# Altium PCB car_engineSteering.PcbDoc
Units mm, origin at the board's own origin, x right, y up, seen from the top; angles counter-clockwise.
Board outline 50 x 60 mm, 2 copper layers (Top Layer, Bottom Layer); 44 components, 40 nets, 141 pads, 9 vias.
Unrouted connection lines stored in the file: 1.
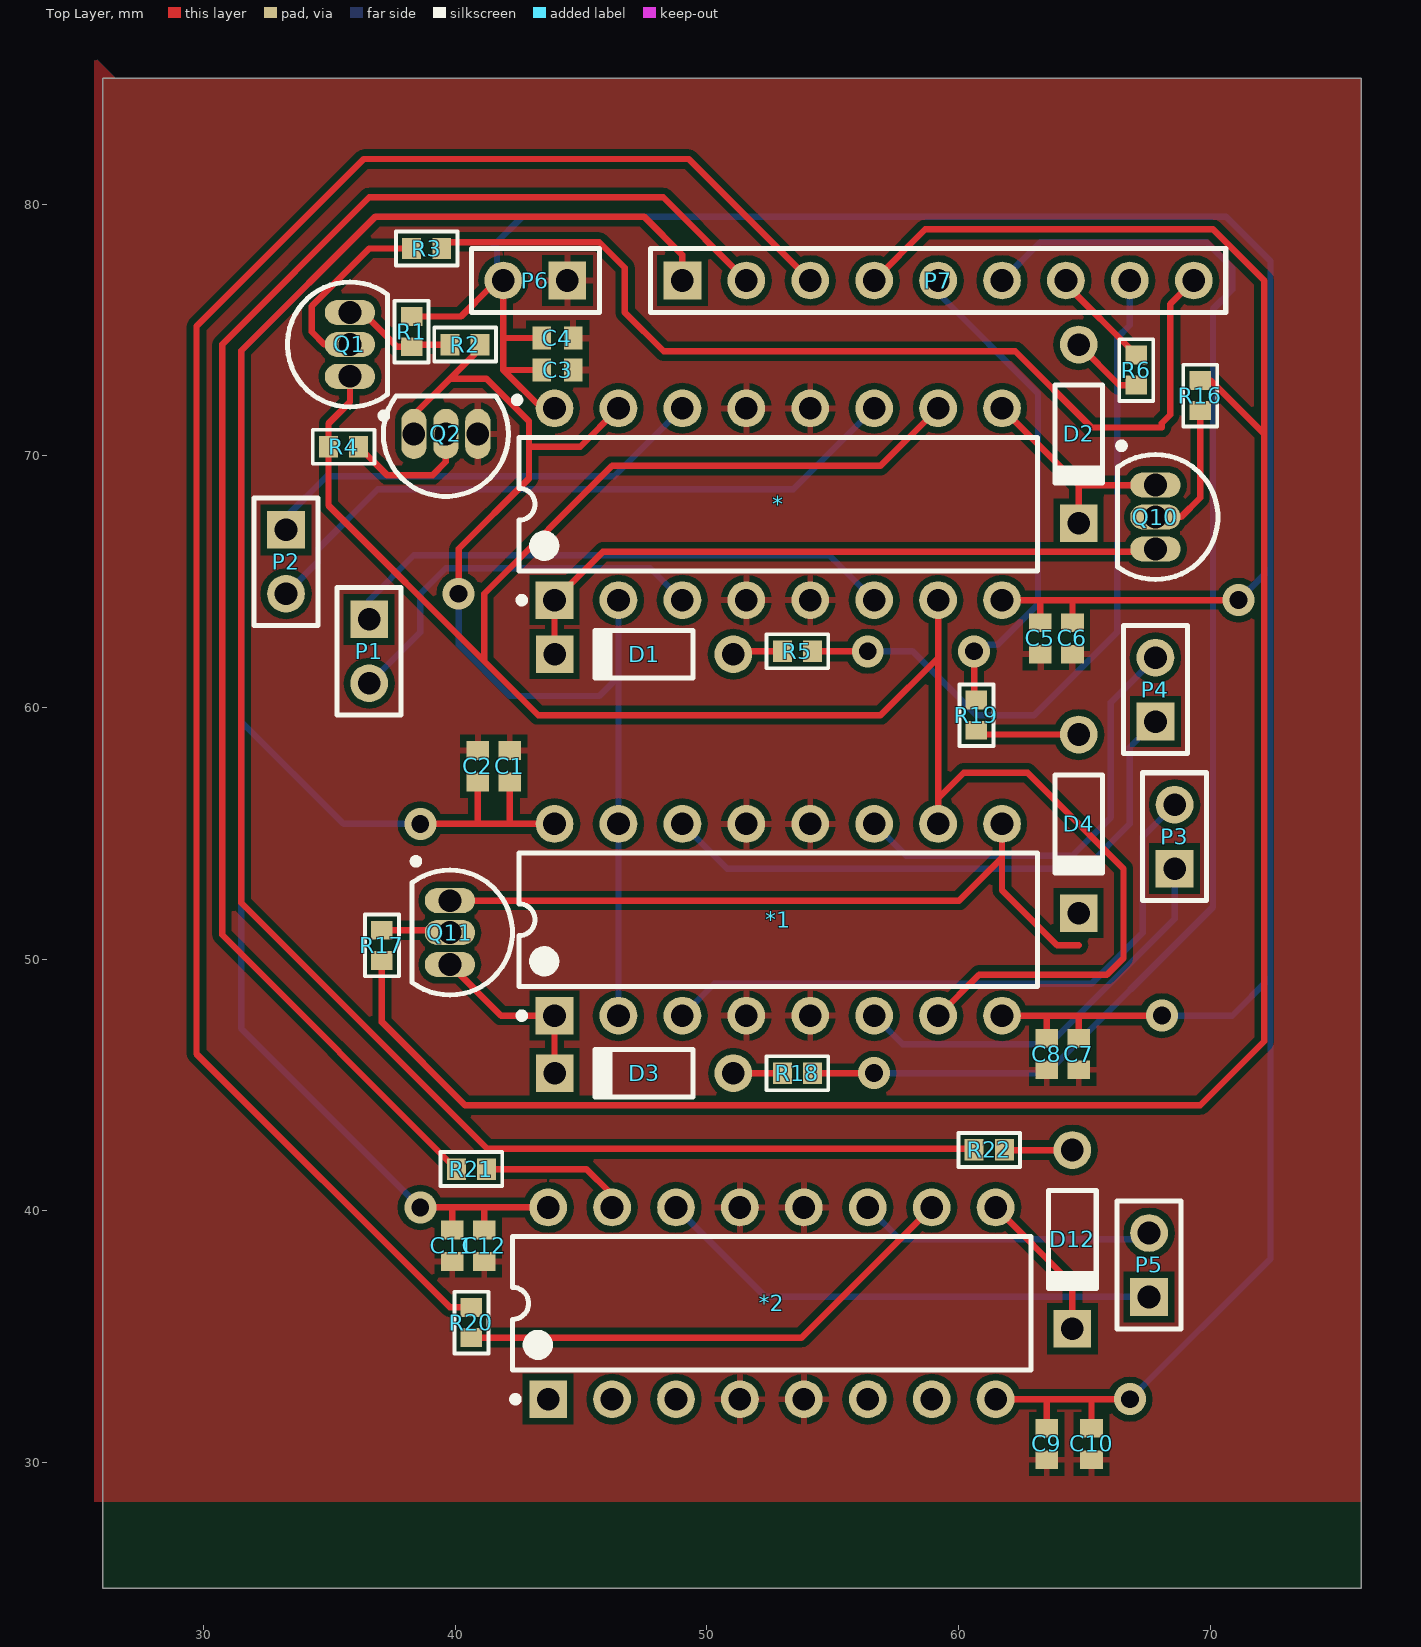
[diagram p0: Top Layer view]
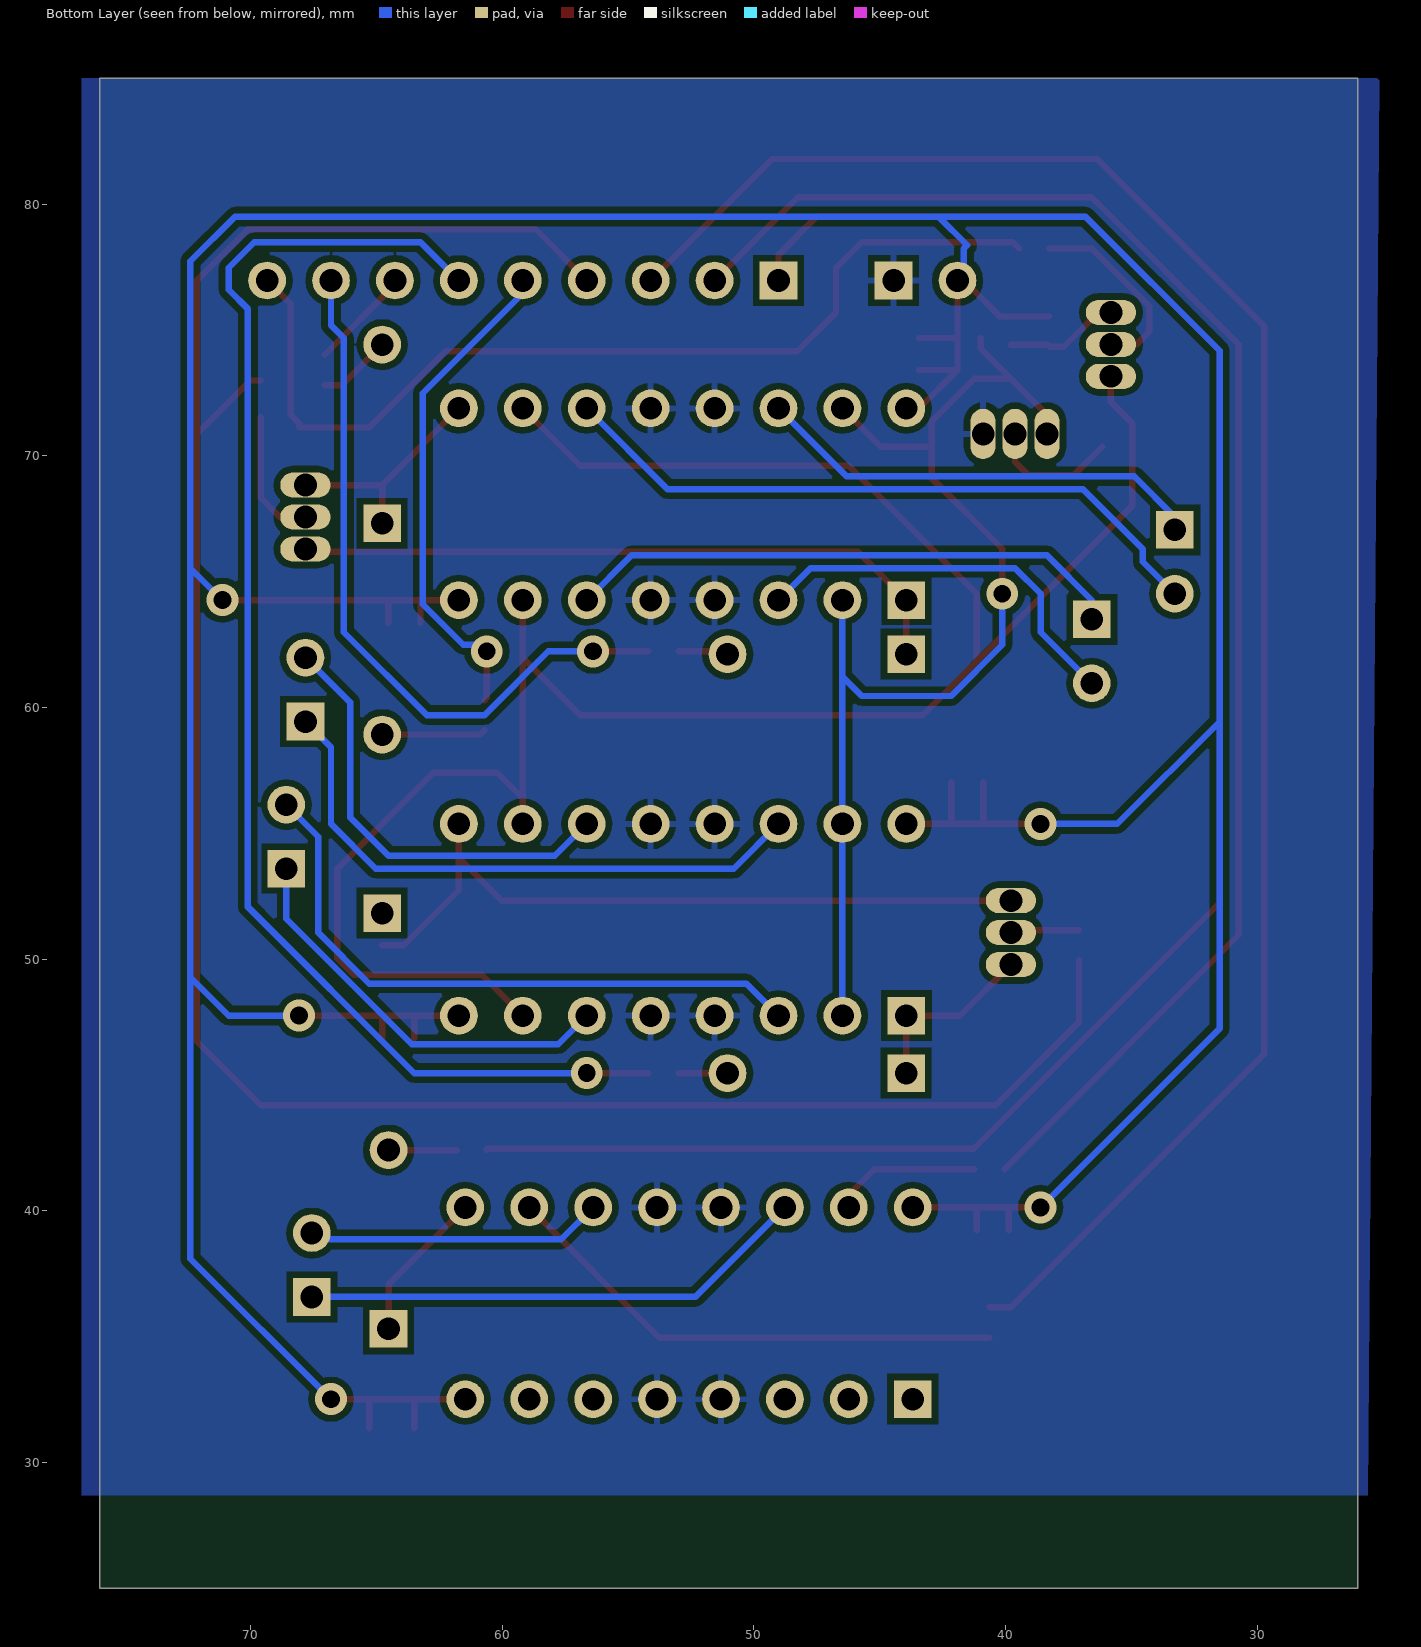
[diagram p1: Bottom Layer view, seen from below]
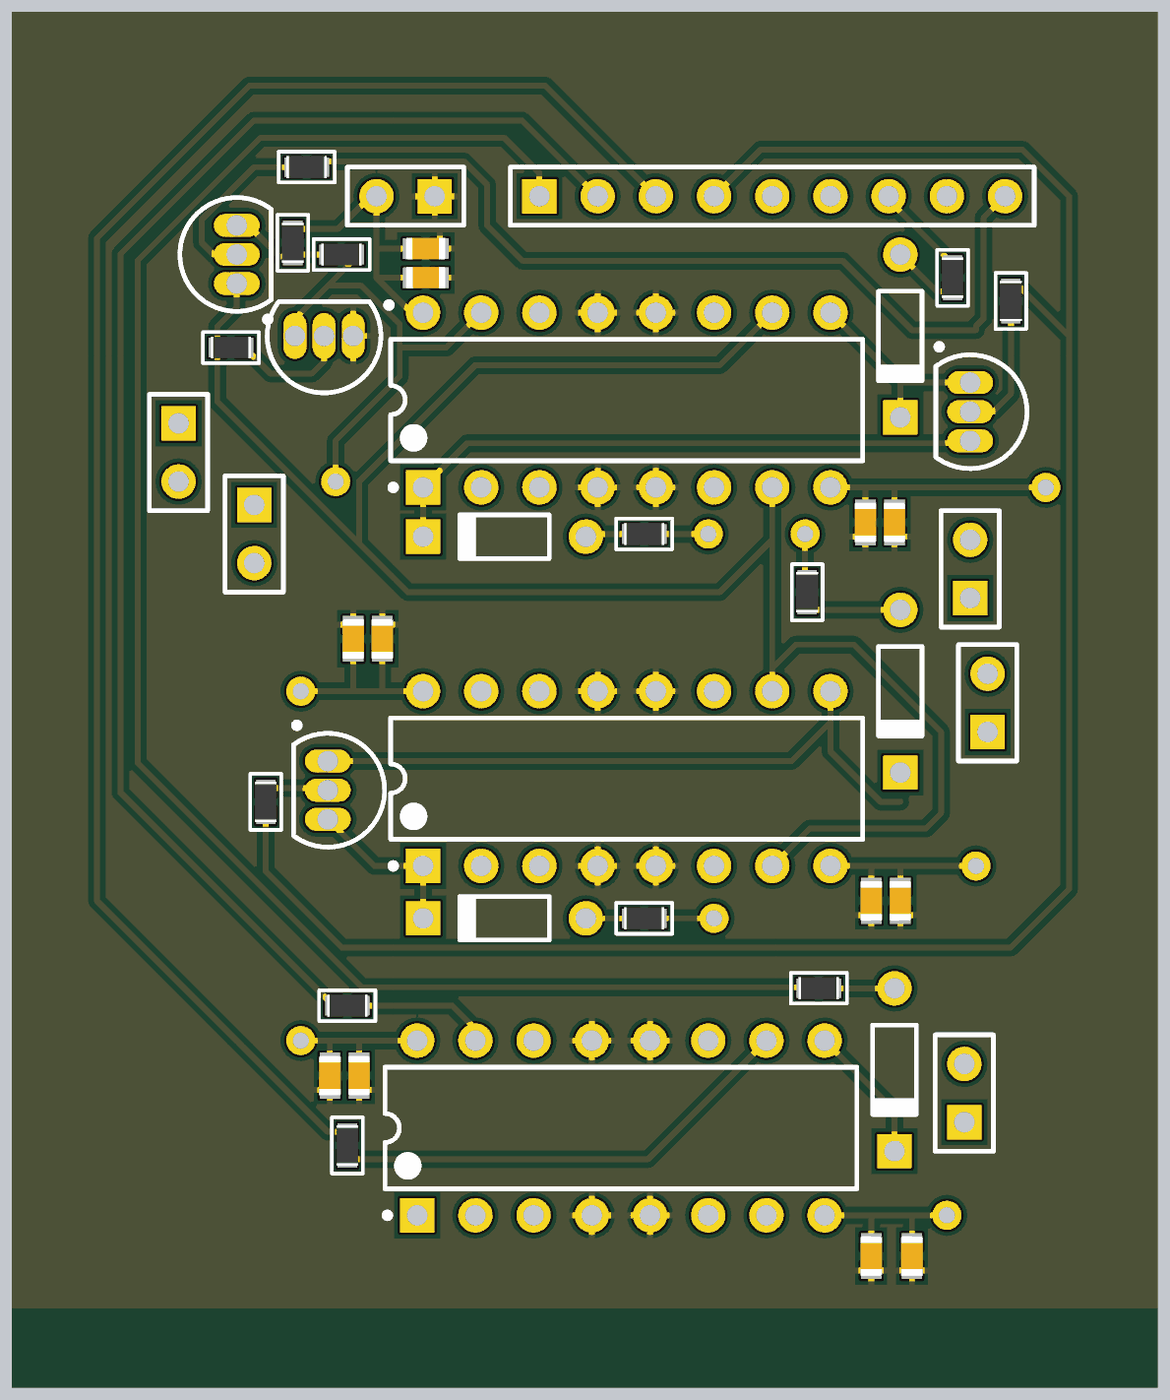
[diagram p2: 3D render of the assembled board from above, using the file's embedded part models]

## Layer stack, top to bottom
Top Solder: solder mask 0.0102, Solder Resist, Dk 3.5
Top Layer: signal copper 0.0356
Dielectric 1: dielectric 0.32, FR-4, Dk 4.8
Bottom Layer: signal copper 0.0356
Bottom Solder: solder mask 0.0102, Solder Resist, Dk 3.5

## Board outline
26,25 76,25 76,85 26,85

## Design rules (kind name [scope] priority, off if disabled: settings)
Clearance [All] p1: gap=0.254 ignorepadtopadclearanceinfootprint=FALSE except(0: Arc-Hole Track-Hole SMDPad-Hole THPad-Hole Via-Hole Fill-Hole Poly-Hole Region-Hole Text-Hole)
PolygonConnect [All] p1: connectstyle=Relief reliefconductorwidth=0.254 reliefentries=4 polygonreliefangle="90 Angle" airgapwidth=0.254
RoutingVias [All] p1: holewidth=0.711 width=1.27 viastyle="Through Hole" minholewidth=0.711 minwidth=1.27 maxholewidth=0.711 maxwidth=1.27
SolderMaskExpansion [All] p1: expansion=0.102
Width [All] p1: maxlimit=0.254 minlimit=0.254 preferedwidth=0.254
30 further rules are at their usual default settings.

## Components (designator, comment, footprint, x,y, rotation, side; value= is the part's Value field where it differs from the comment)
* "L293D" DIP-16 52.832,68.072 r90 top
*1 "L293D" DIP-16 52.832,51.562 r90 top
*2 "L293D" DIP-16 52.578,36.322 r90 top
C1 "Cap Pol1" Cap_0603_HD 42.164,57.658 r90 top value=100nF
C2 "Cap Pol1" Cap_0603_HD 40.894,57.658 r90 top value=22uF
C3 "Cap Pol1" Cap_0603_HD 44.061,73.406 r0 top value=100nF
C4 "Cap Pol1" Cap_0603_HD 44.059,74.676 r0 top value=22uF
C5 "Cap" Cap_0603_HD 63.246,62.738 r90 top value=100nF
C6 "Cap" Cap_0603_HD 64.522,62.738 r90 top value=22uF
C7 "Cap Pol1" Cap_0603_HD 64.77,46.228 r270 top value=100nF
C8 "Cap Pol1" Cap_0603_HD 63.5,46.228 r270 top value=22uF
C9 "Cap Pol1" Cap_0603_HD 63.5,30.734 r270 top value=100nF
C10 "Cap Pol1" Cap_0603_HD 65.278,30.734 r270 top value=22uF
C11 "Cap Pol1" Cap_0603_HD 39.878,38.608 r270 top value=100nF
C12 "Cap Pol1" Cap_0603_HD 41.148,38.608 r270 top value=22uF
D1 "Diode 1N914" DO-35 47.498,62.113 r180 top
D2 "Diode 1N914" DO-35 64.77,70.866 r270 top
D3 "Diode 1N914" DO-35 47.498,45.466 r180 top
D4 "Diode 1N914" DO-35 64.77,55.372 r270 top
D12 "Diode 1N914" DO-35 64.516,38.862 r270 top
P1 "Header 2" HDR1X2 36.576,63.5 r270 top
P2 "Header 2" HDR1X2 33.274,67.056 r270 top
P3 "Header 2" HDR1X2 68.58,53.594 r90 top
P4 "Header 2" HDR1X2 67.818,59.436 r90 top
P5 "Header 2" HDR1X2 67.564,36.576 r90 top
P6 "Header 2" HDR1X2 44.45,76.962 r180 top
P7 "Header 9" HDR1X9 49.022,76.962 r0 top
Q1 "BCW66KH" TO-92A 35.814,74.422 r0 top
Q2 "BCW66KH" TO-92A 39.624,70.866 r90 top
Q10 "BCW66KH" TO-92A 67.818,67.564 r180 top
Q11 "BCW66KH" TO-92A 39.786,51.054 r180 top
R1 "Res" Res_0603_HD_outliine 38.262,74.93 r90 top value=10k
R2 "Res" Res_0603_HD_outliine 40.386,74.416 r180 top value=10k
R3 "Res" Res_0603_HD_outliine 38.862,78.232 r0 top value=10k
R4 "Res" Res_0603_HD_outliine 35.56,70.358 r180 top value=10k
R5 "Res" Res_0603_HD_outliine 53.594,62.23 r180 top value=10k
R6 "Res" Res_0603_HD_outliine 67.056,73.406 r270 top value=10k
R16 "Res" Res_0603_HD_outliine 69.596,72.39 r90 top value=1k0
R17 "Res" Res_0603_HD_outliine 37.084,50.546 r270 top value=10k
R18 "Res" Res_0603_HD_outliine 53.594,45.466 r180 top value=10k
R19 "Res" Res_0603_HD_outliine 60.706,59.69 r270 top value=10k
R20 "Res" Res_0603_HD_outliine 40.64,35.56 r270 top value=10k
R21 "Res" Res_0603_HD_outliine 40.64,41.656 r0 top value=10k
R22 "Res" Res_0603_HD_outliine 61.214,42.418 r0 top value=10k

## Footprints (in the part's own frame and the unit in brackets; to place one, negate y for a bottom-side part, rotate by r counter-clockwise, add the part's x,y. Pads: shape width x height; smd on the part's side, far side on the other; paste and mask are expansions set on the pad)
Cap_0603_HD [mm] "Chip Capacitor, 0603, IPC High Density"
  rect 0.75x0.9 smd: 1(-0.625,0) 2(0.625,0)
  body extent -0.87,-0.48 0.87,0.48, height 0.92
DIP-16 [mm] "DIP; 16 Leads; Row Spacing 7.62 mm; Pitch 2.54 mm"
  rect 1.5x1.5 hole 0.9: 1(-3.81,8.89)
  round 1.5 hole 0.9: 2(-3.81,6.35) 3(-3.81,3.81) 4(-3.81,1.27) 5(-3.81,-1.27) 6(-3.81,-3.81) 7(-3.81,-6.35) 8(-3.81,-8.89) 9(3.81,-8.89) 10(3.81,-6.35) 11(3.81,-3.81) 12(3.81,-1.27) 13(3.81,1.27) 14(3.81,3.81) 15(3.81,6.35) 16(3.81,8.89)
  silkscreen extent -3.93,-10.3 2.65,10.31, body extent -3.6,-10.28 3.6,10.28, height 5.08
DO-35 [mm] "Diode, Axial; Body 3.8 x 1.9 mm (LxDia. max), Lead Dia. 0.53 mm (max)"
  round 1.5 hole 0.9: 1(-3.55,0)
  rect 1.5x1.5 hole 0.9: 2(3.55,0)
  silkscreen extent -1.95,-0.95 2.05,0.95
HDR1X2 [mm] "Connector; Header; 2 Position"
  rect 1.5x1.5 hole 0.9: 1(0,0)
  round 1.5 hole 0.9: 2(2.54,0)
  silkscreen extent -1.27,-1.27 3.81,1.27
HDR1X9 [mm] "Connector; Header; 9 Position"
  rect 1.5x1.5 hole 0.9: 1(0,0)
  round 1.5 hole 0.9: 2(2.54,0) 3(5.08,0) 4(7.62,0) 5(10.16,0) 6(12.7,0) 7(15.24,0) 8(17.78,0) 9(20.32,0)
  silkscreen extent -1.27,-1.27 21.59,1.27
Res_0603_HD_outliine [mm] "Chip Resistor, 0603, IPC High Density with outline"
  rect 0.75x0.85 smd: 1(-0.6,0) 2(0.6,0)
  silkscreen extent -1.22,-0.67 1.22,0.67, body extent -0.87,-0.48 0.87,0.48, height 0.5
TO-92A [mm] "TO, Flat Index; 3 In-Line, Axial Leads; Body Dia. 4.5mm; Leads 0.51 x 0.48 mm (max)"
  oval 2x1 hole 0.9: 1(0,-1.27) 2(0,0) 3(0,1.27)
  silkscreen extent -2.48,-2.95 1.5,2.48, body extent -2.48,-2.5 1.5,2.5, height 6.86

## Part data
* *1 *2: "H-bridge driver"
C1 C2 C3 C4 C7 C8 C9 C10 C11 C12: "Polarized Capacitor (Radial)", LatestRevisionDate=17-Jul-2002, LatestRevisionNote="Re-released for DXP Platform.", PackageDescription="Polarized Capacitor (Radial); 2 Leads", PackageReference=RB7.6-15, Published=8-Jun-2000, Publisher="Altium Limited"
C5 C6: "Capacitor", LatestRevisionDate=17-Jul-2002, LatestRevisionNote="Re-released for DXP Platform.", PackageDescription="Radial Cap, Thru-Hole; 2 Leads; 0.3 in Pin Spacing", PackageReference=RAD-0.3, Published=8-Jun-2000, Publisher="Altium Limited"
D1 D2 D3 D4 D12: "High Conductance Fast Diode", Code_JEDEC=DO-204-AH, ComponentLink1Description="Manufacturer Link", ComponentLink1URL=http://www.fairchildsemi.com/, ComponentLink2Description=Datasheet, ComponentLink2URL=http://www.fairchildsemi.com/ds/1N%2F1N4448.pdf, DatasheetVersion=1997, LatestRevisionDate=17-Jul-2002, LatestRevisionNote="Re-released for DXP Platform.", PackageDescription="Diode, Axial; Body 3.8 x 1.9 mm (LxDia. max), Lead Dia. 0.53 mm (max)", PackageReference=DO-35, Published=8-Jun-2000, Publisher="Altium Limited"
P1 P2 P3 P4 P5 P6: "Header, 2-Pin", LatestRevisionDate=17-Jul-2002, LatestRevisionNote="Re-released for DXP Platform.", Publisher="Altium Limited"
P7: "Header, 9-Pin", LatestRevisionDate=17-Jul-2002, LatestRevisionNote="Re-released for DXP Platform.", Publisher="Altium Limited"
Q1 Q2 Q10 Q11: library part BCW66KHE6327, "NPN Transistor"
R1 R2 R3 R4 R5 R6 R16 R17 R18 R19 R20 R21 R22: "Resistor"

## Via types
v1: diameter 1.27, hole 0.711, Top Layer to Bottom Layer, 9 vias

## Nets (pads, with @x,y where several pads share a name; then routed paths per layer and width w, separated by ;. In a path a pad name is that pad's centre, name@x,y a point inside that pad or via, vN(x,y) a via of type N, cw(c..) or ccw(c..) an arc to the next point about the centre after c; other vN are vias at no path point)
GND: *1.4 *1.5 *1.12 *1.13 *2.4 *2.5 *2.12 *2.13 *.4 *.5 *.12 *.13 C1.2 C2.2 C3.2 C4.2 C5.1 C6.1 C7.2 C8.2 C9.2 C10.2 C11.2 C12.2 P6.1 Q2.1
Net*1_1: *1.1 D3.2 Q11.3 | length 7.5
  Top Layer w0.254: Q11.3 41.818,47.752 *1.1 D3.2@43.942,45.298
Net*1_2: *1.2 *1.15 *.2 *.15 Q2.3 R2.1 | length 47.8
  Top Layer w0.254: Q2.3@38.262,70.612 Q2.3@38.262,71.444 ; Q2.3 38.354,71.628 39.786,73.06 ; v1(40.132,64.516) 40.132,66.298 42.926,69.092 42.926,70.358 ; R2.1@40.986,74.676 40.986,74.26 39.786,73.06 ; *.15 44.958,70.358 42.926,70.358 ; 39.786,73.06 41.24,73.06 42.926,71.374 42.926,70.358
  Bottom Layer w0.254: v1(40.132,64.516) 40.132,62.484 42.164,60.452 45.72,60.452 46.482,61.214 ; *1.2 *1.15 46.482,61.214 ; *.2 46.482,61.214
Net*1_3: *1.3 P3.2 | length 25.6
  Bottom Layer w0.254: *1.3 50.292,49.022 65.279,49.022 67.31,51.053 67.31,54.864 P3.2 P3.2@68.834,56.388
Net*1_6: *1.6 P3.1 | length 16.8
  Bottom Layer w0.254: *1.6 57.773,46.621 63.596,46.621 68.58,51.605 P3.1 P3.1@68.834,53.848
Net*1_7: *1.7 *1.10 *.7 *.10 Q1.1 R4.2 | length 88
  Top Layer w0.254: Q1.1 35.814,72.136 34.96,71.282 R4.2 34.96,68.021 41.148,61.833 ; *1.7 60.811,49.381 65.891,49.381 66.548,50.038 66.548,53.594 62.738,57.404 60.198,57.404 59.182,56.388 ; *1.10 59.182,56.388 ; *.7 59.182,61.976 ; *.10 56.896,69.596 46.228,69.596 41.148,64.516 41.148,61.833 ; 41.148,61.833 43.291,59.69 56.896,59.69 59.182,61.976 ; 59.182,56.388 59.182,61.976
Net*1_9: *1.9 D4.2 Q11.1 | length 29.2
  Top Layer w0.254: Q11.1 60.014,52.324 61.722,54.032 ; *1.9 61.722,54.032 ; 64.77,50.552 63.91,50.552 61.722,52.74 61.722,54.032
Net*1_11: *1.11 P4.2 | length 18.2
  Bottom Layer w0.254: *1.11 57.912,54.102 64.516,54.102 66.04,55.626 66.04,60.198 P4.2 P4.2@68.234,62.392
Net*1_14: *1.14 P4.1 | length 23.7
  Bottom Layer w0.254: *1.14 50.8,53.594 65.024,53.594 66.802,55.372 66.802,58.42 P4.1
Net*2_9: *2.9 D12.2 | length 6.1
  Top Layer w0.254: *2.9 64.516,37.084 D12.2
Net*2_10: *2.10 R20.2 | length 20.7
  Top Layer w0.254: R20.2 53.756,34.96 *2.10 *2.10@58.928,40.386
Net*2_11: *2.11 P5.2 | length 11.7
  Bottom Layer w0.254: *2.11 57.658,38.862 P5.2@67.564,38.862
Net*2_14: *2.14 P5.1 | length 20.3
  Bottom Layer w0.254: *2.14 52.324,36.576 P5.1
Net*2_15: *2.15 R21.2 | length 5.9
  Top Layer w0.254: R21.2 45.212,41.656 46.136,40.732 46.136,40.224 *2.15
Net*_1: *.1 D1.2 Q10.3 | length 26.7
  Top Layer w0.254: D1.2@43.942,62.23 *.1 45.865,66.185 67.709,66.185 Q10.3
Net*_3: *.3 P1.2 | length 15.8
  Bottom Layer w0.254: P1.2 38.608,62.992 38.608,64.516 39.624,65.532 47.752,65.532 *.3
Net*_6: *.6 P1.1 | length 22.3
  Bottom Layer w0.254: P1.1 36.576,64.262 38.354,66.04 54.864,66.04 *.6
Net*_9: *.9 D2.2 Q10.1 | length 9.1
  Top Layer w0.254: *.9@61.884,72.044 *.9 64.77,68.834 ; D2.2 64.77,68.834 ; Q10.1 64.77,68.834
Net*_11: *.11 P2.2 | length 27.2
  Bottom Layer w0.254: P2.2@33.274,65.024 P2.2 34.544,65.786 34.544,66.294 36.922,68.672 53.432,68.672 *.11
Net*_14: *.14 P2.1 | length 18
  Bottom Layer w0.254: P2.1 33.274,67.564 34.89,69.18 46.32,69.18 *.14
NetD1_1: D1.1 R5.2 | length 1.9
  Top Layer w0.254: D1.1@51.048,62.23 R5.2
NetD2_1: D2.1 R6.2 | length 3
  Top Layer w0.254: D2.1 66.38,72.806 R6.2
NetD3_1: D3.1 R18.2 | length 2.4
  Top Layer w0.254: D3.1@50.794,45.05 51.21,45.466 R18.2
NetD4_1: D4.1 R19.2 | length 4.9
  Top Layer w0.254: R19.2 60.874,58.922 D4.1@64.262,58.922 ; D4.1@64.256,58.928 D4.1@64.262,58.922 ; D4.1@64.77,58.414 D4.1@64.262,58.922 ; D4.1 D4.1@64.262,58.922
NetD12_1: D12.1 R22.2 | length 2.7
  Top Layer w0.254: R22.2@61.814,42.412 D12.1
NetP7_1: P7.1 R22.1 | length 76.6
  Top Layer w0.254: P7.1@49.022,76.87 P7.1 49.022,77.978 47.498,79.502 36.83,79.502 31.496,74.168 31.496,52.232 41.266,42.462 60.614,42.462 R22.1
NetP7_2: P7.2 R21.1 | length 61.3
  Top Layer w0.254: R21.1 30.734,50.962 30.734,74.422 36.576,80.264 48.26,80.264 P7.2 P7.2@51.562,76.87
NetP7_3: P7.3 R20.1 | length 73.2
  Top Layer w0.254: R20.1 39.786,36.16 29.718,46.228 29.718,75.143 36.363,81.788 49.276,81.788 P7.3 P7.3@54.102,76.87
NetP7_4: P7.4 R16.2 R17.2 | length 91
  Top Layer w0.254: R17.2 37.084,47.498 40.386,44.196 69.596,44.196 72.136,46.736 72.136,70.866 ; P7.4@56.642,76.708 P7.4 58.674,78.994 70.104,78.994 72.136,76.962 72.136,70.866 ; R16.2 70.012,72.99 72.136,70.866
NetP7_5: P7.5 R19.1 | length 19.9
  Top Layer w0.254: P7.5@59.182,76.87 P7.5 ; v1(60.614,62.23) 60.614,60.382 R19.1
  Bottom Layer w0.254: P7.5 59.182,76.454 63.154,72.482 63.154,64.095 61.543,62.484 60.868,62.484 v1(60.614,62.23)
NetP7_6: P7.6 R18.1 | length 54.6
  Top Layer w0.254: R18.1 v1(56.642,45.466) ; P7.6@61.722,76.87 P7.6
  Bottom Layer w0.254: v1(56.642,45.466) 63.5,45.466 70.104,52.07 70.104,75.831 70.866,76.593 70.866,77.47 69.85,78.486 63.246,78.486 P7.6
NetP7_7: P7.7 R6.1 | length 4.1
  Top Layer w0.254: P7.7 64.262,76.8 R6.1
NetP7_8: P7.8 R5.1 | length 28.7
  Top Layer w0.254: R5.1 v1(56.388,62.23)
  Bottom Layer w0.254: v1(56.388,62.23) 58.166,62.23 60.706,59.69 62.992,59.69 66.294,62.992 66.294,74.676 66.802,75.184 P7.8
NetP7_9: P7.9 R3.2 | length 39.2
  Top Layer w0.254: R3.2 39.716,78.486 45.72,78.486 46.736,77.47 46.736,75.692 48.281,74.147 62.251,74.147 65.278,71.12 68.072,71.12 68.072,71.294 68.406,71.628 68.406,76.026 P7.9
NetQ1_2: Q1.2 R3.1 | length 7.7
  Top Layer w0.254: Q1.2 34.798,74.422 34.29,74.93 34.29,75.946 36.576,78.232 R3.1
NetQ1_3: Q1.3 R1.1 R2.2 | length 4.6
  Top Layer w0.254: Q1.3 36.322,75.692 37.684,74.33 R1.1 38.348,74.416 R2.2
NetQ2_2: Q2.2 R4.1 | length 5.3
  Top Layer w0.254: R4.1 37.287,69.231 39.097,69.231 39.624,69.758 Q2.2
NetQ10_2: Q10.2 R16.1 | length 6.1
  Top Layer w0.254: Q10.2@67.656,67.478 67.822,67.486 Q10.2@68.406,67.516 ; Q10.2 68.834,67.564 69.596,68.326 R16.1@69.596,71.536
NetQ11_2: Q11.2 R17.1 | length 2.7
  Top Layer w0.254: R17.1 39.694,51.146 Q11.2
VCC: *1.8 *1.16 *2.8 *2.16 *.8 *.16 C1.1 C2.1 C3.1 C4.1 C5.2 C6.2 C7.1 C8.1 C9.1 C10.1 C11.1 C12.1 P6.2 R1.2 | length 202.4
  Top Layer w0.254: R1.2 40.224,75.53 P6.2@41.402,76.708 ; v1(38.608,40.132) 39.878,40.132 ; v1(38.608,55.372) 40.894,55.372 ; C11.1 39.878,40.132 ; C2.1 40.894,55.372 ; C12.1 41.148,40.132 ; P6.2 41.91,74.676 ; C1.1 42.164,55.372 ; C4.1 41.91,74.676 ; C3.1 41.91,73.406 ; *2.16 41.148,40.132 ; *1.16 42.164,55.372 ; *.16 43.434,71.882 41.91,73.406 ; *2.8 63.5,32.512 ; *1.8 63.5,47.752 ; *.8 63.246,64.262 ; C5.2 63.246,64.262 ; C9.1 63.5,32.512 ; C8.1 63.5,47.752 ; C6.2 64.522,64.256 64.516,64.262 ; C7.1 64.77,47.752 ; C10.1 65.278,32.512 ; v1(66.802,32.512) 65.278,32.512 ; v1(68.072,47.752) 64.77,47.752 ; v1(71.12,64.262) 64.516,64.262 ; 39.878,40.132 41.148,40.132 ; 40.894,55.372 42.164,55.372 ; 41.91,73.406 41.91,74.676 ; 63.246,64.262 64.516,64.262 ; 63.5,32.512 65.278,32.512 ; 63.5,47.752 64.77,47.752
  Bottom Layer w0.254: v1(38.608,40.132) 31.496,47.244 31.496,59.436 ; v1(38.608,55.372) 35.56,55.372 31.496,59.436 ; P6.2@41.656,76.962 41.656,78.232 41.529,78.359 42.672,79.502 ; v1(66.802,32.512) 72.39,38.1 72.39,49.276 ; v1(68.072,47.752) 70.866,47.752 72.39,49.276 ; v1(71.12,64.262) 72.39,65.532 ; 31.496,59.436 31.496,74.168 36.83,79.502 42.672,79.502 ; 42.672,79.502 70.612,79.502 72.39,77.724 72.39,65.532 ; 72.39,49.276 72.39,65.532
pads on no net: *2.1 *2.2 *2.3 *2.6 *2.7

## Polygon pours and split planes (outlines as drawn)
GND on Bottom Layer "Bottom Layer-GND" (solid, pour order 14): 25.155,85 76.708,85 76.708,28.702 25.618,28.702
GND on Bottom Layer "Bottom Layer-GND 1" (solid, pour order 2): 51.816,59.69
GND on Top Layer "Top Layer-GND" (solid, pour order 8): 25.654,85.852 26.506,85 76,85 76,28.448 25.654,28.448
GND on Top Layer "Top Layer-GND 1" (solid, pour order 12): 25.146,85.852
GND on Top Layer "Top Layer-GND 2" (solid, pour order 10): 60.452,50.546

## Silkscreen, mask and mechanical layers (free items; w line width, h text height)
Mechanical 1:
  lines w0.254: 26,25 76,25 76,85.09 26,85.09